# Altium PCB Main.PcbDoc
Units mm, origin at the board's own origin, x right, y up, seen from the top; angles counter-clockwise.
Board outline 64.5 x 55.5 mm, 2 copper layers (Top Layer, Bottom Layer), stack 1.135 mm thick; 13 components, 9 nets, 45 pads, 1 vias.
Unrouted connection lines stored in the file: 6.
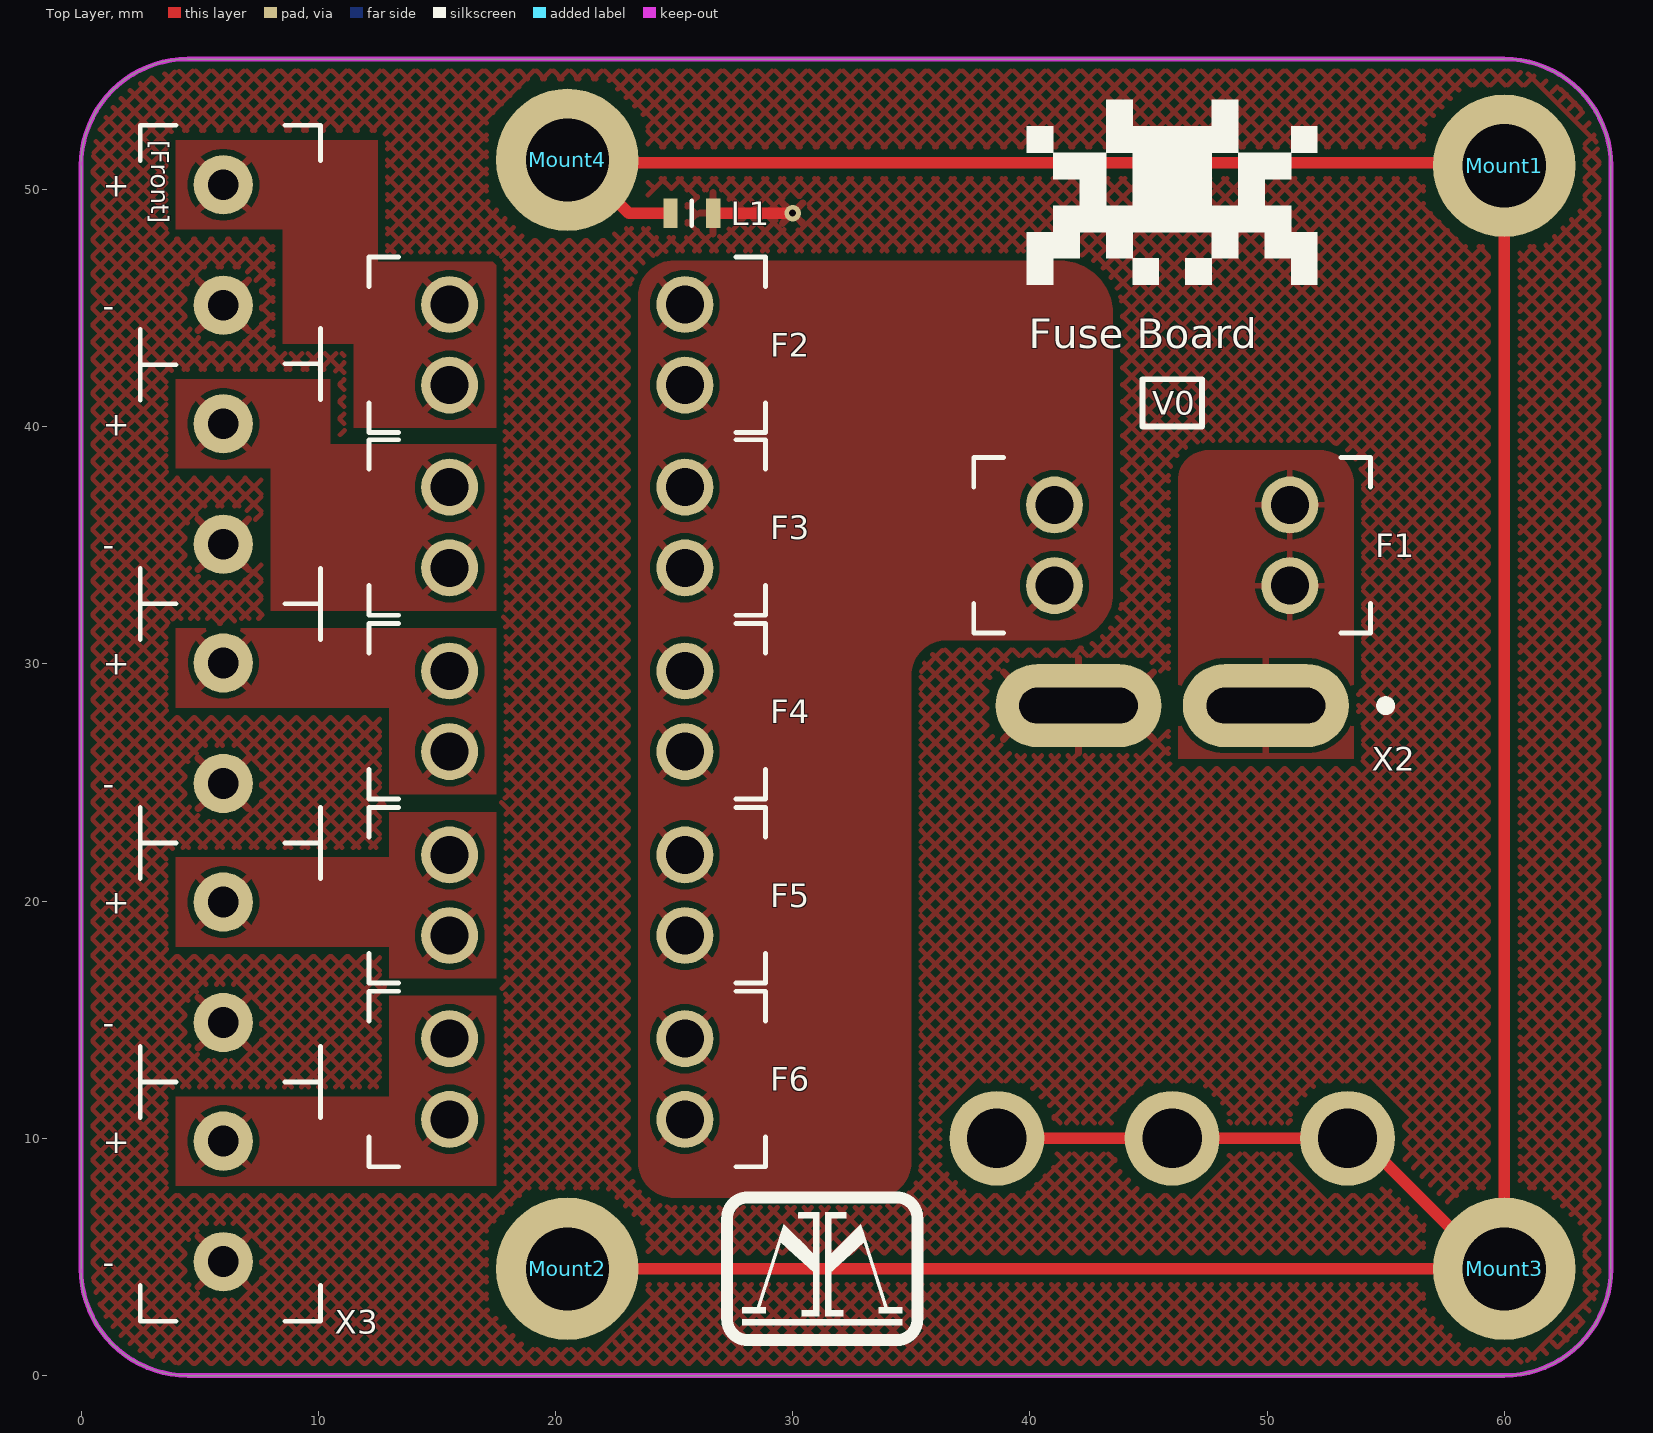
[diagram p0: Top Layer view]
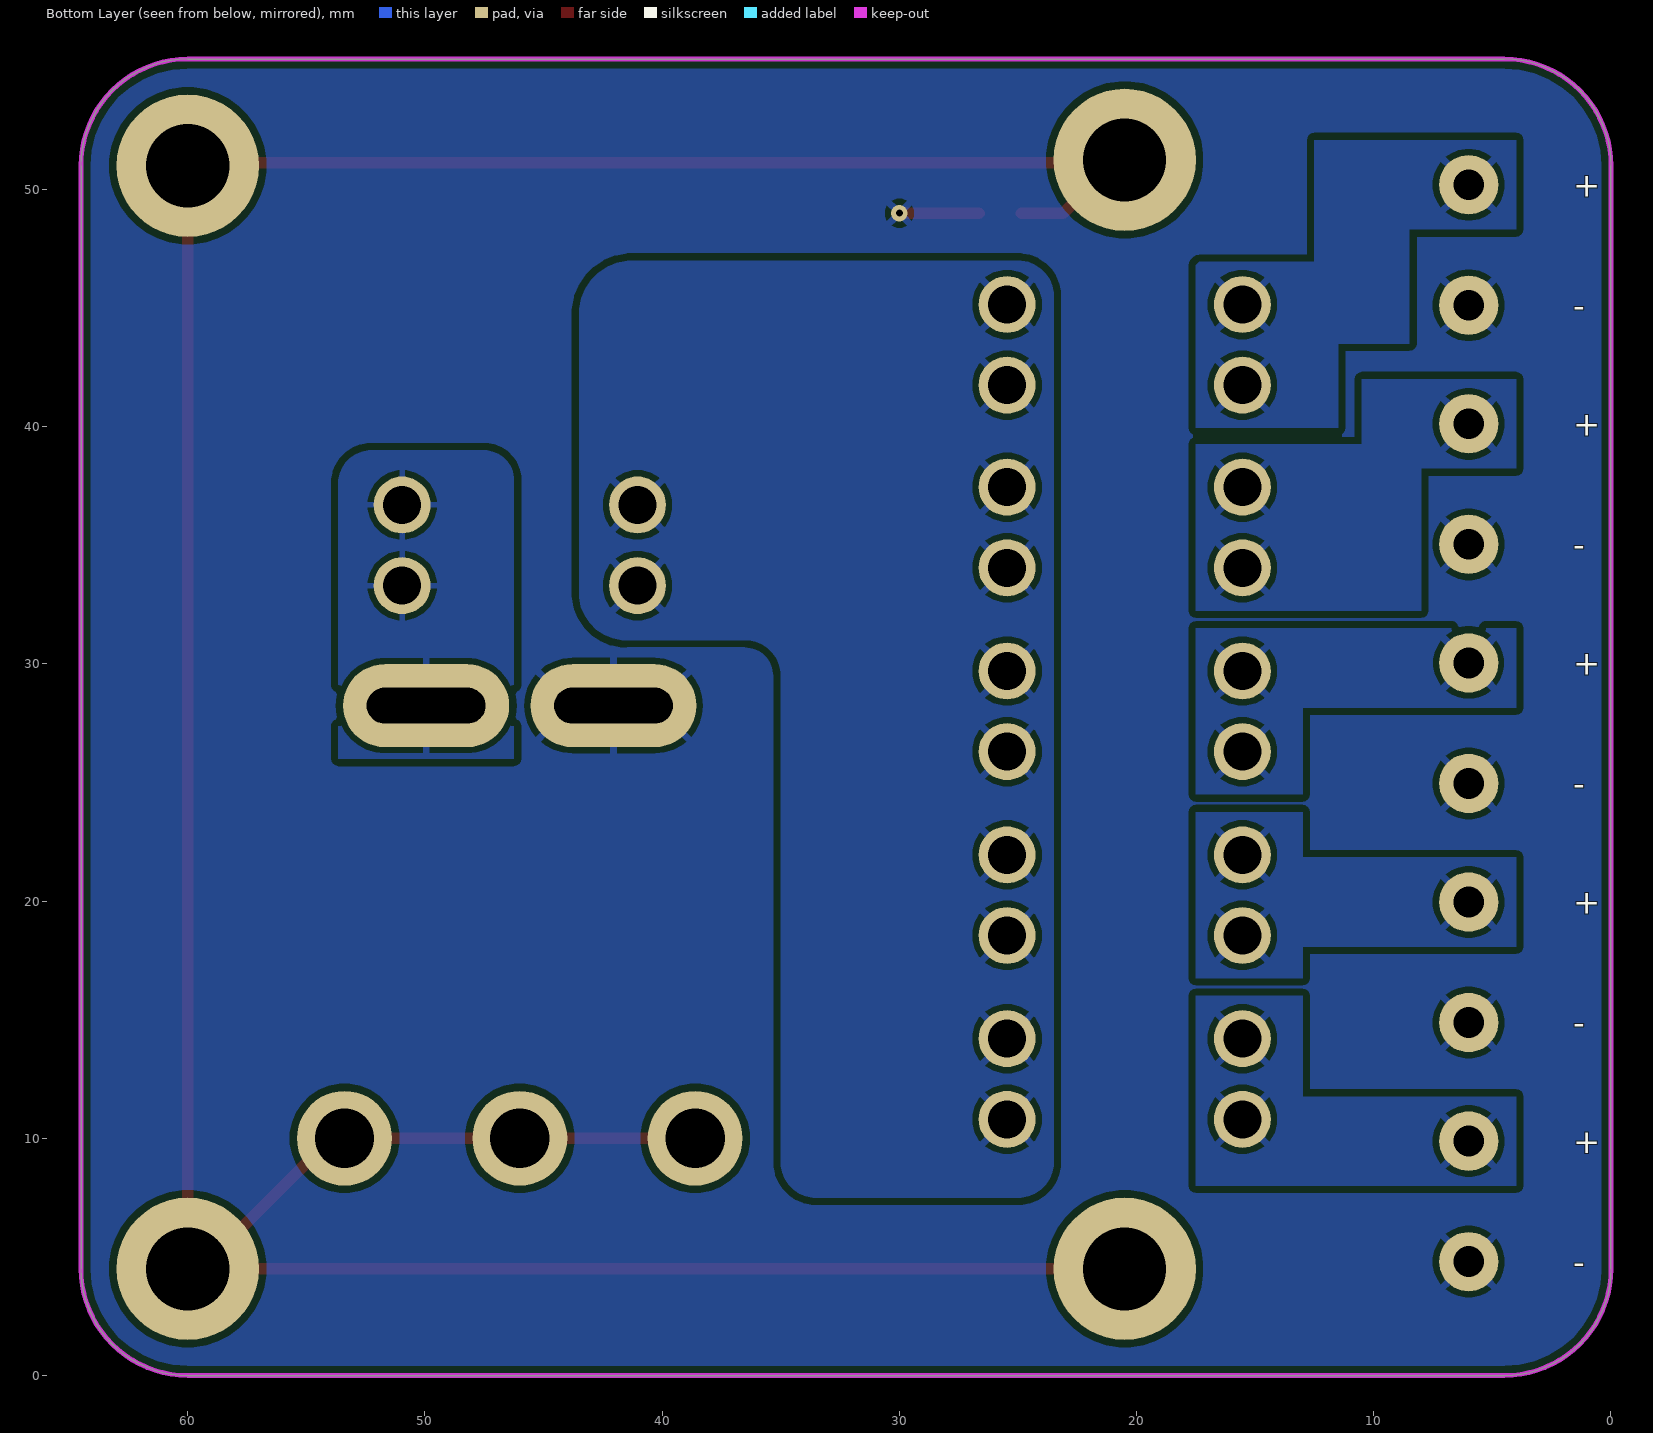
[diagram p1: Bottom Layer view, seen from below]

## Layer stack, top to bottom
Top Solder: solder mask 0.0102, Solder Resist, Dk 3.8
Top Layer: signal copper 0.035
Dielectric 1: prepreg 1.065, FR-4, Dk 4.8
Bottom Layer: signal copper 0.035
Bottom Solder: solder mask 0.0102, Solder Resist, Dk 3.8

## Board outline
4.5,0 cw(c4.5,4.5) 0,4.5 0,51 cw(c4.5,51) 4.5,55.5 60,55.5 cw(c60,51) 64.5,51 64.5,4.5 cw(c60,4.5) 60,0

## Design rules (kind name [scope] priority, off if disabled: settings)
BoardOutlineClearance [All] p1: gap=0.2 ignorepadtopadclearanceinfootprint=FALSE
Clearance "inPolygon Clearance" [InPolygon] p1: gap=0.3 ignorepadtopadclearanceinfootprint=TRUE // this rule ensures that every net within a polygon of a different net has a set clearance from the poly
Clearance "Different Diff Pair" [All] p2: gap=0.2 ignorepadtopadclearanceinfootprint=TRUE
Clearance "Same Diff Pair" [All] p3: gap=0.1 ignorepadtopadclearanceinfootprint=TRUE
Clearance "Different Nets" [not InAnyDifferentialPair] p4: gap=0.3 ignorepadtopadclearanceinfootprint=TRUE except(0.1: Arc-SMDPad Arc-THPad Arc-Via Arc-Text Track-SMDPad Track-THPad Track-Via Track-Text SMDPad-Text THPad-Text Via-Text Fill-Text Poly-Text Region-Text Text-Text; 0.12: Arc-Arc Arc-Track Track-Track; 0.15: SMDPad-SMDPad SMDPad-THPad SMDPad-Via THPad-THPad THPad-Via Via-Via; 0.2: Arc-Hole Track-Hole SMDPad-Hole THPad-Hole Via-Hole Fill-Hole Poly-Hole Region-Hole Text-Hole)
Clearance "Same Net" [not InAnyDifferentialPair] p5: gap=0 ignorepadtopadclearanceinfootprint=TRUE except(0.1: THPad-Via; 0.18: Arc-Arc Arc-Track Track-Track)
ComponentClearance [All] p1: gap=0.102 collisioncheckmode=3 verticalgap=0.102 showdistances=TRUE
DiffPairsRouting "Ethernet Routing" [InDifferentialPairClass('Ethernet_Pairs')] p1: maxlimit=0.2 minlimit=0.2 mostfreqgap=0.2 toplayer_minwidth=0.25 toplayer_maxwidth=0.25 toplayer_prefwidth=0.25 bottomlayer_minwidth=0.25 bottomlayer_maxwidth=0.25 bottomlayer_prefwidth=0.25 impedanceprofiledriven=TRUE maxuncoupledlength=12.7
DiffPairsRouting "USB Routing" [InDifferentialPairClass('USB_Pairs')] p2: maxlimit=0.127 minlimit=0.127 mostfreqgap=0.127 toplayer_minwidth=0.23 toplayer_maxwidth=0.23 toplayer_prefwidth=0.23 bottomlayer_minwidth=0.23 bottomlayer_maxwidth=0.23 bottomlayer_prefwidth=0.23 impedanceprofiledriven=TRUE maxuncoupledlength=12.7
DiffPairsRouting "CAN Routing" [InDifferentialPairClass('CAN_Pairs')] p3: maxlimit=0.5 minlimit=0.5 mostfreqgap=0.5 toplayer_minwidth=0.201 toplayer_maxwidth=0.201 toplayer_prefwidth=0.201 bottomlayer_minwidth=0.201 bottomlayer_maxwidth=0.201 bottomlayer_prefwidth=0.201 impedanceprofiledriven=TRUE maxuncoupledlength=12.7
Height [All] p1: minheight=0 maxheight=1816.048 prefheight=12.7
HoleSize [All] p1: absolutevalues=TRUE maxlimit=6.3 minlimit=0.3 maxpercent=80.000 minpercent=20.000
HoleToHoleClearance [All] p1: gap=0.25 allowstackedmicrovias=FALSE
Length [All] p1: maxlimit=43.432 minlimit=0 usedelayunits=TRUE mindelay=0.000000 maxdelay=10000.000000
MatchedLengths "Diff Pair Matched Delays" [InDifferentialPairClass('Ethernet_Pairs') or InDifferentialPairClass('USB_Pairs') or InDifferentialPairClass('CAN_Pairs')] p1: tolerance=5 checknetsindiffpair=TRUE checkdiffpairvsdiffpair=FALSE checkxsignals=FALSE checkothers=FALSE usedelayunits=TRUE delaytolerance=100.000000
MinimumAnnularRing [All] p1: minimumring=0.2
MinimumSolderMaskSliver [All] p1: minsoldermaskwidth=0
PlaneClearance "Supply Net Clearance" [InNetClass('Supply_Nets')] p1: clearance=0.5
PlaneClearance "All Nets" [All] p2: clearance=0.3
PolygonConnect "Supply Nets" [InNetClass('Supply_Nets')] p1: connectstyle=Relief reliefconductorwidth=0.3 reliefentries=4 polygonreliefangle="90 Angle" conductorbypadedge=TRUE mindistance=0.381 enablemindistance=FALSE airgapwidth=0.254
PolygonConnect General [All] p2: connectstyle=Relief reliefconductorwidth=0.254 reliefentries=4 polygonreliefangle="90 Angle" airgapwidth=0.254
RoutingVias [All] p1: holewidth=0.2 width=0.35 viastyle="Through Hole" minholewidth=0.15 minwidth=0.3 maxholewidth=6.3 maxwidth=6.55
SilkToSilkClearance [All] p1: silktosilkclearance=0
SilkToSolderMaskClearance [All] p1: minsilkscreentomaskgap=0 clearancetoexposedcopper=TRUE
SolderMaskExpansion [All] p1: expansion=0.075 istentingtop=FALSE
SupplyNets "Schematic Supply Nets_5" [InNet('GND')] p1: voltage=24.00
SupplyNets "Schematic Supply Nets_3" [InNet('VBatt+')] p2: voltage=24.00
SupplyNets "Schematic Supply Nets_4" [InNet('NetF3_1')] p3: voltage=24.00
SupplyNets "Schematic Supply Nets_2" [InNet('NetF5_1')] p4: voltage=24.00
SupplyNets "Schematic Supply Nets" [InNet('NetF6_1')] p5: voltage=24.00
SupplyNets "Schematic Supply Nets_15" [InNet('NetF2_1')] p6: voltage=24.00
SupplyNets "Schematic Supply Nets_10" [InNet('NetF4_1')] p7: voltage=24.00
SupplyNets "Schematic Supply Nets_1" [InNet('Earth')] p8: voltage=0.000
UnRoutedNet [All] p1: checkbadconnections=TRUE
Width "nRF Width" [InNetClass('nRF Signal')] p1: maxlimit=0.379 minlimit=0.379 preferedwidth=0.379 impedanceprofiledriven=TRUE minimp=50.000000 maximp=50.000000 favimp=50.000000 checkconnectedcopper=TRUE
Width [All] p2: maxlimit=100 minlimit=0.1 preferedwidth=0.3
20 further rules are at their usual default settings.

## Classes and differential pairs
net class Supply_Nets: Earth GND NetF2_1 NetF3_1 NetF4_1 NetF5_1 NetF6_1 VBatt+

## Components (designator, comment, footprint, x,y, rotation, side; value= is the part's Value field where it differs from the comment)
F1 "Mini" "[Mount] (Mini) Automotive Mount" 46,35 r180 top
F2 "Mini" "[Mount] (Mini) Automotive Mount" 20.5,43.45 r0 top
F3 "Mini" "[Mount] (Mini) Automotive Mount" 20.5,35.75 r0 top
F4 "Mini" "[Mount] (Mini) Automotive Mount" 20.5,28 r0 top
F5 "Mini" "[Mount] (Mini) Automotive Mount" 20.5,20.25 r0 top
F6 "Mini" "[Mount] (Mini) Automotive Mount" 20.5,12.5 r0 top
L1 "652-MH2029-300Y" "[Ferrite] SMD 0805" 25.75,49 r0 top
Mount1 "M3 Mount Hole" "[Mount] M3 Mount Hole" 60,51 r0 top
Mount2 "M3 Mount Hole" "[Mount] M3 Mount Hole" 20.5,4.5 r180 top
Mount3 "M3 Mount Hole" "[Mount] M3 Mount Hole" 60,4.5 r0 top
Mount4 "M3 Mount Hole" "[Mount] M3 Mount Hole" 20.5,51.25 r180 top
X2 "Anderson 2pos Right-Angle" "[Anderson] 2pos Right-Angle 1327G17" 46,10 r0 top
X3 "10pin Screw Terminal" "[Screw Terminal] 10pin 5mm" 6,27.5 r270 top

## Footprints (in the part's own frame and the unit in brackets; to place one, negate y for a bottom-side part, rotate by r counter-clockwise, add the part's x,y. Pads: shape width x height; smd on the part's side, far side on the other; paste and mask are expansions set on the pad)
"[Anderson] 2pos Right-Angle 1327G17" [mm]
  oval 7x3.5 hole 1.5 slot 5 at 0 deg: 1(3.95,18.24) 2(-3.95,18.24)
  round 4 hole 2.5: MH(-7.39,0) MH(0,0) MH(7.39,0)
  silkscreen extent 8.8,18.04 9.2,18.44, body extent -8.4,-9.86 7.9,18.74, height 8.4
"[Ferrite] SMD 0805" [mm]
  rect 0.6x1.25 smd: 1(-0.9,0) 2(0.9,0)
  silkscreen extent 0,-0.53 0,0.53, body extent -1,-0.6 1,0.6, height 1.1
"[Mount] (Mini) Automotive Mount" [mm] "3568"
  round 2.4 hole 1.6: 1(-4.96,-1.7) 1(-4.96,1.7) 2(4.96,-1.7) 2(4.96,1.7)
  silkscreen extent -8.36,-3.7 8.36,3.7, body extent -8,-3.36 8,3.36, height 7.6
"[Mount] M3 Mount Hole" [mm] "Place at least 4.5mm from board edge. Plated."
  round 6 hole 3.5: 1(0,0)
"[Screw Terminal] 10pin 5mm" [mm]
  round 2.5 hole 1.3: 1(-22.7,0) 2(-17.62,0) 3(-12.62,0) 4(-7.54,0) 5(-2.54,0) 6(2.54,0) 7(7.54,0) 8(12.62,0) 9(17.62,0) 10(22.7,0)
  silkscreen extent -25.21,-3.5 25.21,4.1, body extent -25.65,-3.5 25.21,4.1, height 9.99

## Part data
F1 F2 F3 F4 F5 F6: library part "[Mount] (Mini) Automotive Mount", "3568", Supplier Part Number 1=36-3568-ND, Ampacity=5A, Supplier 1=DigiKey
L1: library part "[Ferrite] SMD 0805 3A 30ohm", Res @ Freq="30 @ 100MHz", Size Package=0805, Supplier Part Number 1=MH2029-300YCT-ND, Supplier 1=DigiKey
Mount1 Mount2 Mount3 Mount4: library part "[Mount] M3 Mount Hole", "Place at least 4.5mm from board edge. Plated."
X2: library part "[Anderson] 2pos Right-Angle"
X3: library part "[Screw Terminal] 10pin", "x5", Supplier Part Number 1=102-6145-ND, Supplier 1=DigiKey

## Via types
v1: diameter 0.7, hole 0.3, Top Layer to Bottom Layer, 1 vias

## Nets (pads, with @x,y where several pads share a name; then routed paths per layer and width w, separated by ;. In a path a pad name is that pad's centre, name@x,y a point inside that pad or via, vN(x,y) a via of type N, cw(c..) or ccw(c..) an arc to the next point about the centre after c; other vN are vias at no path point)
Earth: L1.1 Mount1.1 Mount2.1 Mount3.1 Mount4.1 X2.MH | length 154.6
  Top Layer w0.5: Mount2.1 Mount3.1 ; L1.1 23.101,49 20.851,51.25 Mount4.1 20.625,51.125 59.875,51.125 Mount1.1 Mount3.1 ; X2.MH@38.61,10 46,10 53.39,10 53.945,10 59.445,4.5 Mount3.1
GND: L1.2 X2.2 X3.2 X3.4 X3.6 X3.8 X3.10 | length 3.4
  Top Layer w0.5: L1.2 v1(30,49)
NetF1_1: F1.1 X2.1
NetF2_1: F2.1 X3.1
NetF3_1: F3.1 X3.3
NetF4_1: F4.1 X3.5
NetF5_1: F5.1 X3.7
NetF6_1: F6.1 X3.9
VBatt+: F1.2 F2.2 F3.2 F4.2 F5.2 F6.2

## Polygon pours and split planes (outlines as drawn)
GND on Top Layer "GND Top" (hatched 45Degree grid 0.508 track 0.203, remove dead copper, pour order 61): 0,55.5 64.5,55.5 64.5,0 0,0
NetF1_1 on Top Layer "Batt In Top" (solid, pour order 59): 47.5,39 52.25,39 cw(c52.25,37.6) 53.65,37.6 53.65,26 46.25,26 46.25,37.75 cw(c47.5,37.75)
NetF5_1 on Top Layer "Term 4 Top" (solid, pour order 55): 4,21.84 13,21.84 13,23.75 17.5,23.75 17.5,16.75 13,16.75 13,18.08 4,18.08
NetF6_1 on Top Layer "Term 5 Top" (solid, pour order 56): 13,16 17.5,16 17.5,8 4,8 4,11.76 13,11.76
NetF4_1 on Top Layer "Term 3 Top" (solid, pour order 54): 4,31.5 17.5,31.5 17.5,24.5 13,24.5 13,28.16 4,28.16
NetF3_1 on Top Layer "Term 2 Top" (solid, pour order 57): 4,42 10.5,42 10.5,39.25 17.5,39.25 17.5,32.25 8,32.25 8,38.24 4,38.24
NetF2_1 on Top Layer "Term 1 Top" (solid, pour order 58): 4,52.08 12.5,52.08 12.5,46.95 17.365,46.95 17.5,46.815 17.5,39.95 11.5,39.95 11.5,43.5 8.5,43.5 8.5,48.32 4,48.32
VBatt+ on Top Layer "VBatt+ Top Poly" (solid, remove dead copper, pour order 60): 25,47 41.25,47 cw(c41.25,44.75) 43.5,44.75 43.5,33 cw(c41.5,33) 41.5,31 36.5,31 ccw(c36.5,29.5) 35,29.5 35,9 cw(c33.5,9) 33.5,7.5 25,7.5 cw(c25,9) 23.5,9 23.5,45.5 cw(c25,45.5)
VBatt+ on Bottom Layer "VBatt+ Bottom Poly" (solid, remove dead copper, pour order 68): 25,47 41.25,47 cw(c41.25,44.75) 43.5,44.75 43.5,33 cw(c41.5,33) 41.5,31 36.5,31 ccw(c36.5,29.5) 35,29.5 35,9 cw(c33.5,9) 33.5,7.5 25,7.5 cw(c25,9) 23.5,9 23.5,45.5 cw(c25,45.5)
GND on Bottom Layer "GND Bottom" (solid, remove dead copper, pour order 69): 0,55.5 64.5,55.5 64.5,0 0,0
NetF1_1 on Bottom Layer "Batt In Bottom" (solid, pour order 67): 47.5,39 52.25,39 cw(c52.25,37.6) 53.65,37.6 53.65,26 46.25,26 46.25,37.75 cw(c47.5,37.75)
NetF3_1 on Bottom Layer "Term 2 Bottom" (solid, pour order 65): 4,42 10.5,42 10.5,39.25 17.5,39.25 17.5,32.25 8,32.25 8,38.24 4,38.24
NetF5_1 on Bottom Layer "Term 4 Bottom" (solid, pour order 63): 4,21.84 13,21.84 13,23.75 17.5,23.75 17.5,16.75 13,16.75 13,18.08 4,18.08
NetF4_1 on Bottom Layer "Term 3 Bottom" (solid, pour order 62): 4,31.5 17.5,31.5 17.5,24.5 13,24.5 13,28.16 4,28.16
NetF6_1 on Bottom Layer "Term 5 Bottom" (solid, pour order 64): 13,16 17.5,16 17.5,8 4,8 4,11.76 13,11.76
NetF2_1 on Bottom Layer "Term 1 Top" (solid, pour order 66): 4,52.08 12.5,52.08 12.5,46.95 17.365,46.95 17.5,46.815 17.5,39.95 11.5,39.95 11.5,43.5 8.5,43.5 8.5,48.32 4,48.32

## Keep-outs
Keep-Out Layer:
  the board outline again, w0.2

## Silkscreen, mask and mechanical layers (free items; w line width, h text height)
Top Overlay:
  drawing of 13 lines, arcs and shapes, not listed
  text "+" at 0.917,49.7 h1
  text "-" at 0.917,44.62 h1
  text "Fuse Board" at 39.961,43.3 h1.25
  text "V0" at 45.167,40.5 h1
  text "+" at 0.917,39.62 h1
  text "-" at 0.917,34.54 h1
  text "+" at 0.917,29.54 h1
  text "-" at 0.917,24.46 h1
  text "+" at 0.917,19.46 h1
  text "-" at 0.917,14.38 h1
  text "+" at 0.917,9.38 h1
  text "-" at 0.917,4.3 h1
Bottom Overlay:
  text "+" at 1.583,49.7 h1
  text "-" at 1.583,44.62 h1
  text "+" at 1.583,39.62 h1
  text "-" at 1.583,34.54 h1
  text "+" at 1.583,29.54 h1
  text "-" at 1.583,24.46 h1
  text "+" at 1.583,19.46 h1
  text "-" at 1.583,14.38 h1
  text "+" at 1.583,9.38 h1
  text "-" at 1.583,4.3 h1
Poly Planning:
  lines w0.2: 4,8 17.5,8 17.5,16 13,16 13,11.76 4,11.76 4,8 ; 4,18.08 13,18.08 13,16.75 17.5,16.75 17.5,23.75 13,23.75 13,21.84 4,21.84 4,18.08 ; 4,28.16 13,28.16 13,24.5 17.5,24.5 17.5,31.5 4,31.5 4,28.16 ; 4,38.24 8,38.24 8,32.25 17.5,32.25 17.5,39.25 10.5,39.25 10.5,42 4,42 4,38.24 ; 4,48.32 8.5,48.32 8.5,43.5 11.5,43.5 11.5,39.95 17.5,39.95 17.5,46.95 12.5,46.95 12.5,52.08 4,52.08 4,48.32 ; 23.5,7.5 35,7.5 35,31 43.5,31 43.5,47 23.5,47 23.5,7.5 ; 46.25,26 53.65,26 53.65,39 46.25,39 46.25,26

## Text inside footprints (layer, text, board x,y; h text height)
X3: Top Overlay "[Front]" at 2.958,52.082 h0.75 r270